# Altium PCB Ver5.PcbDoc
Units mil, origin at the board's own origin, x right, y up, seen from the top; angles counter-clockwise.
Board outline 1574.8 x 1574.8 mil, 2 copper layers (Top Layer, Bottom Layer); 42 components, 28 nets, 223 pads, 54 vias.
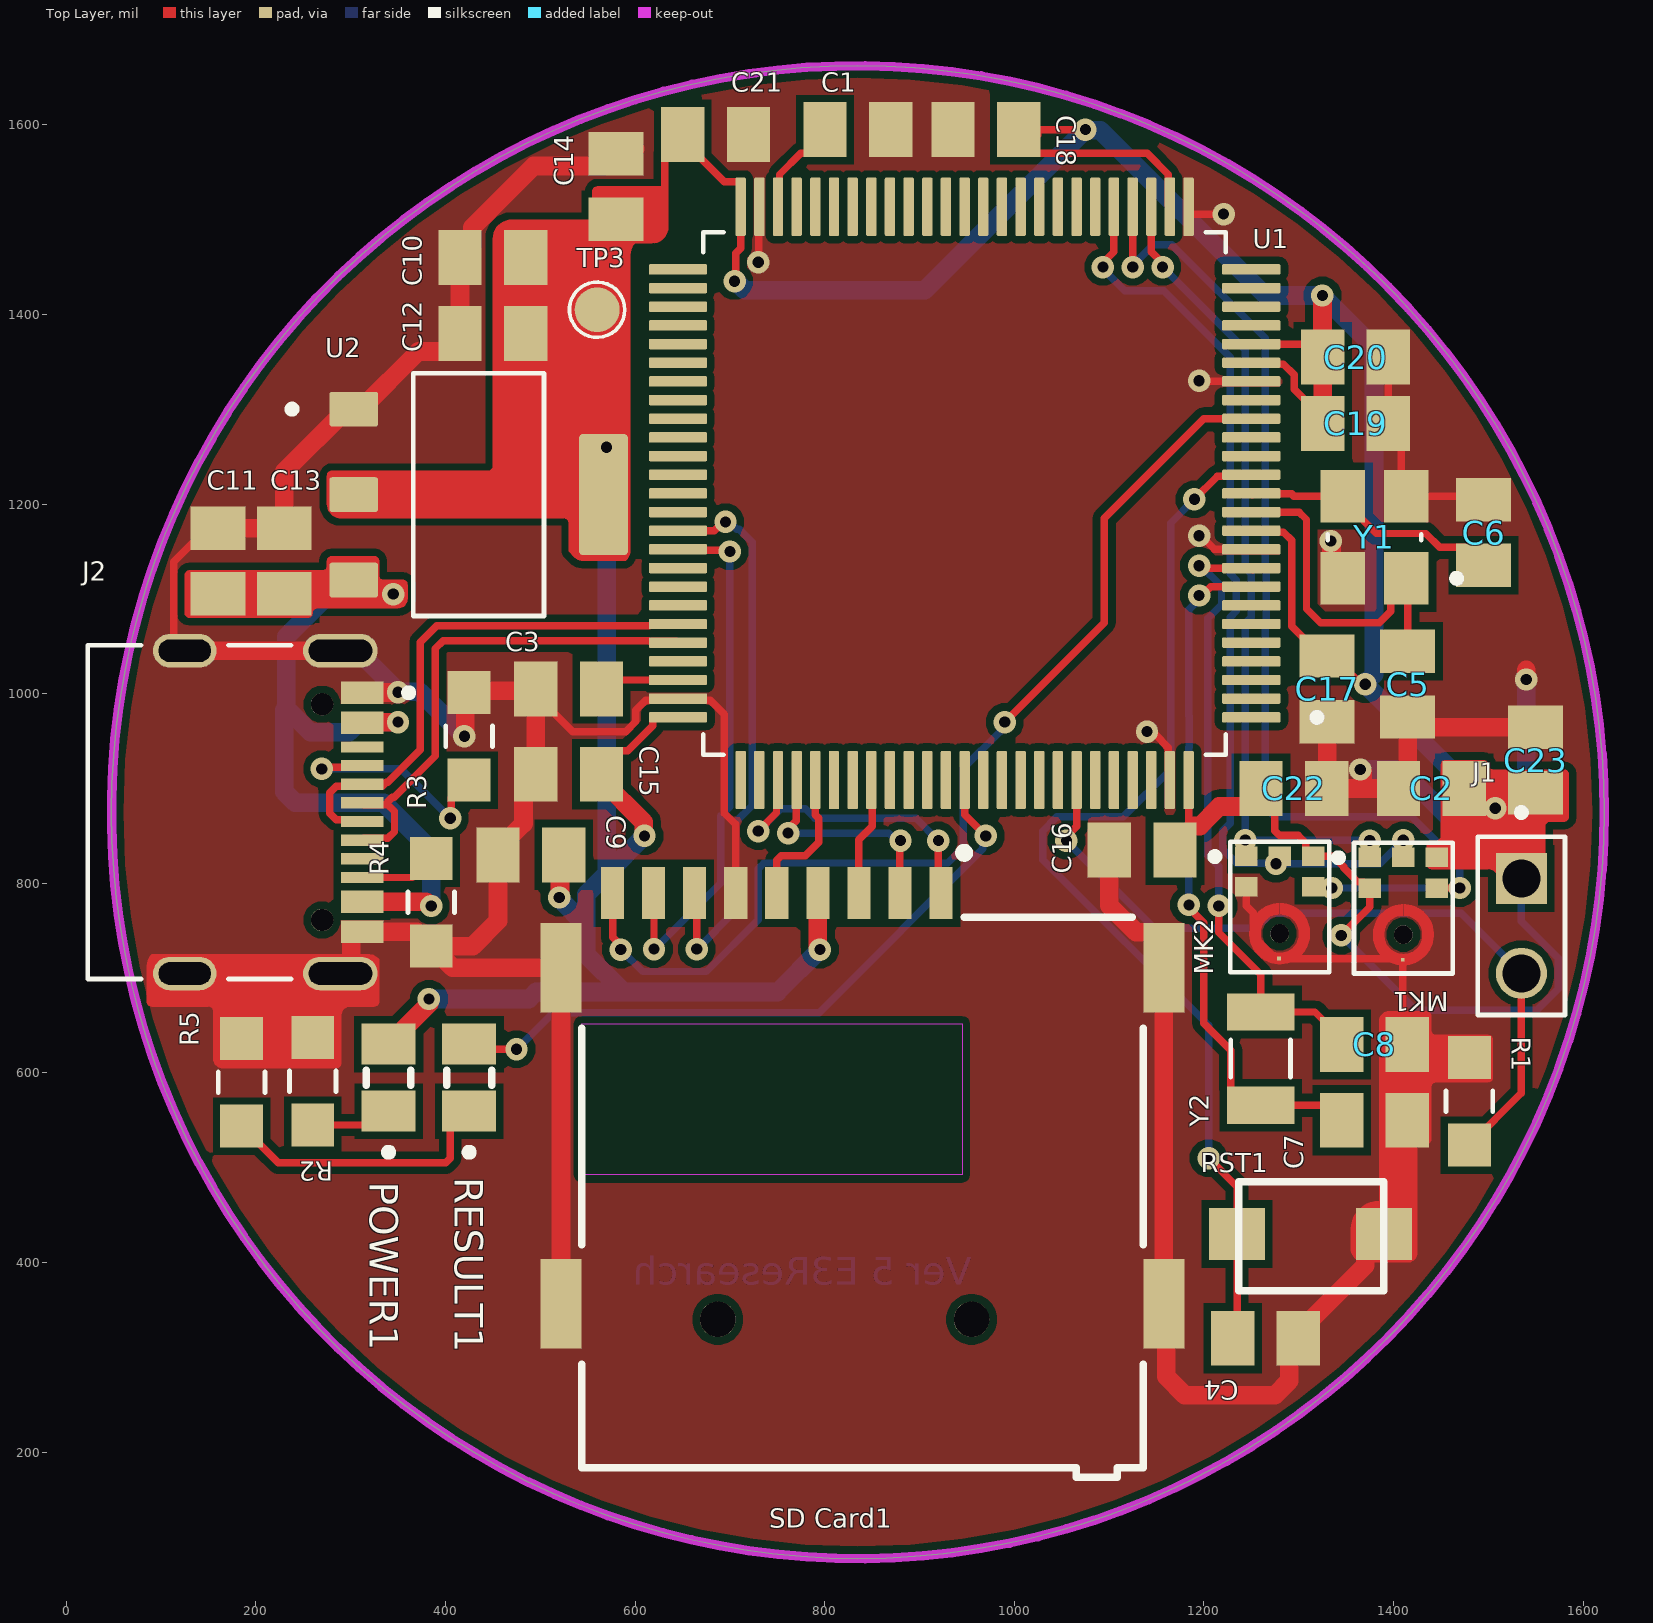
[diagram p0: Top Layer view]
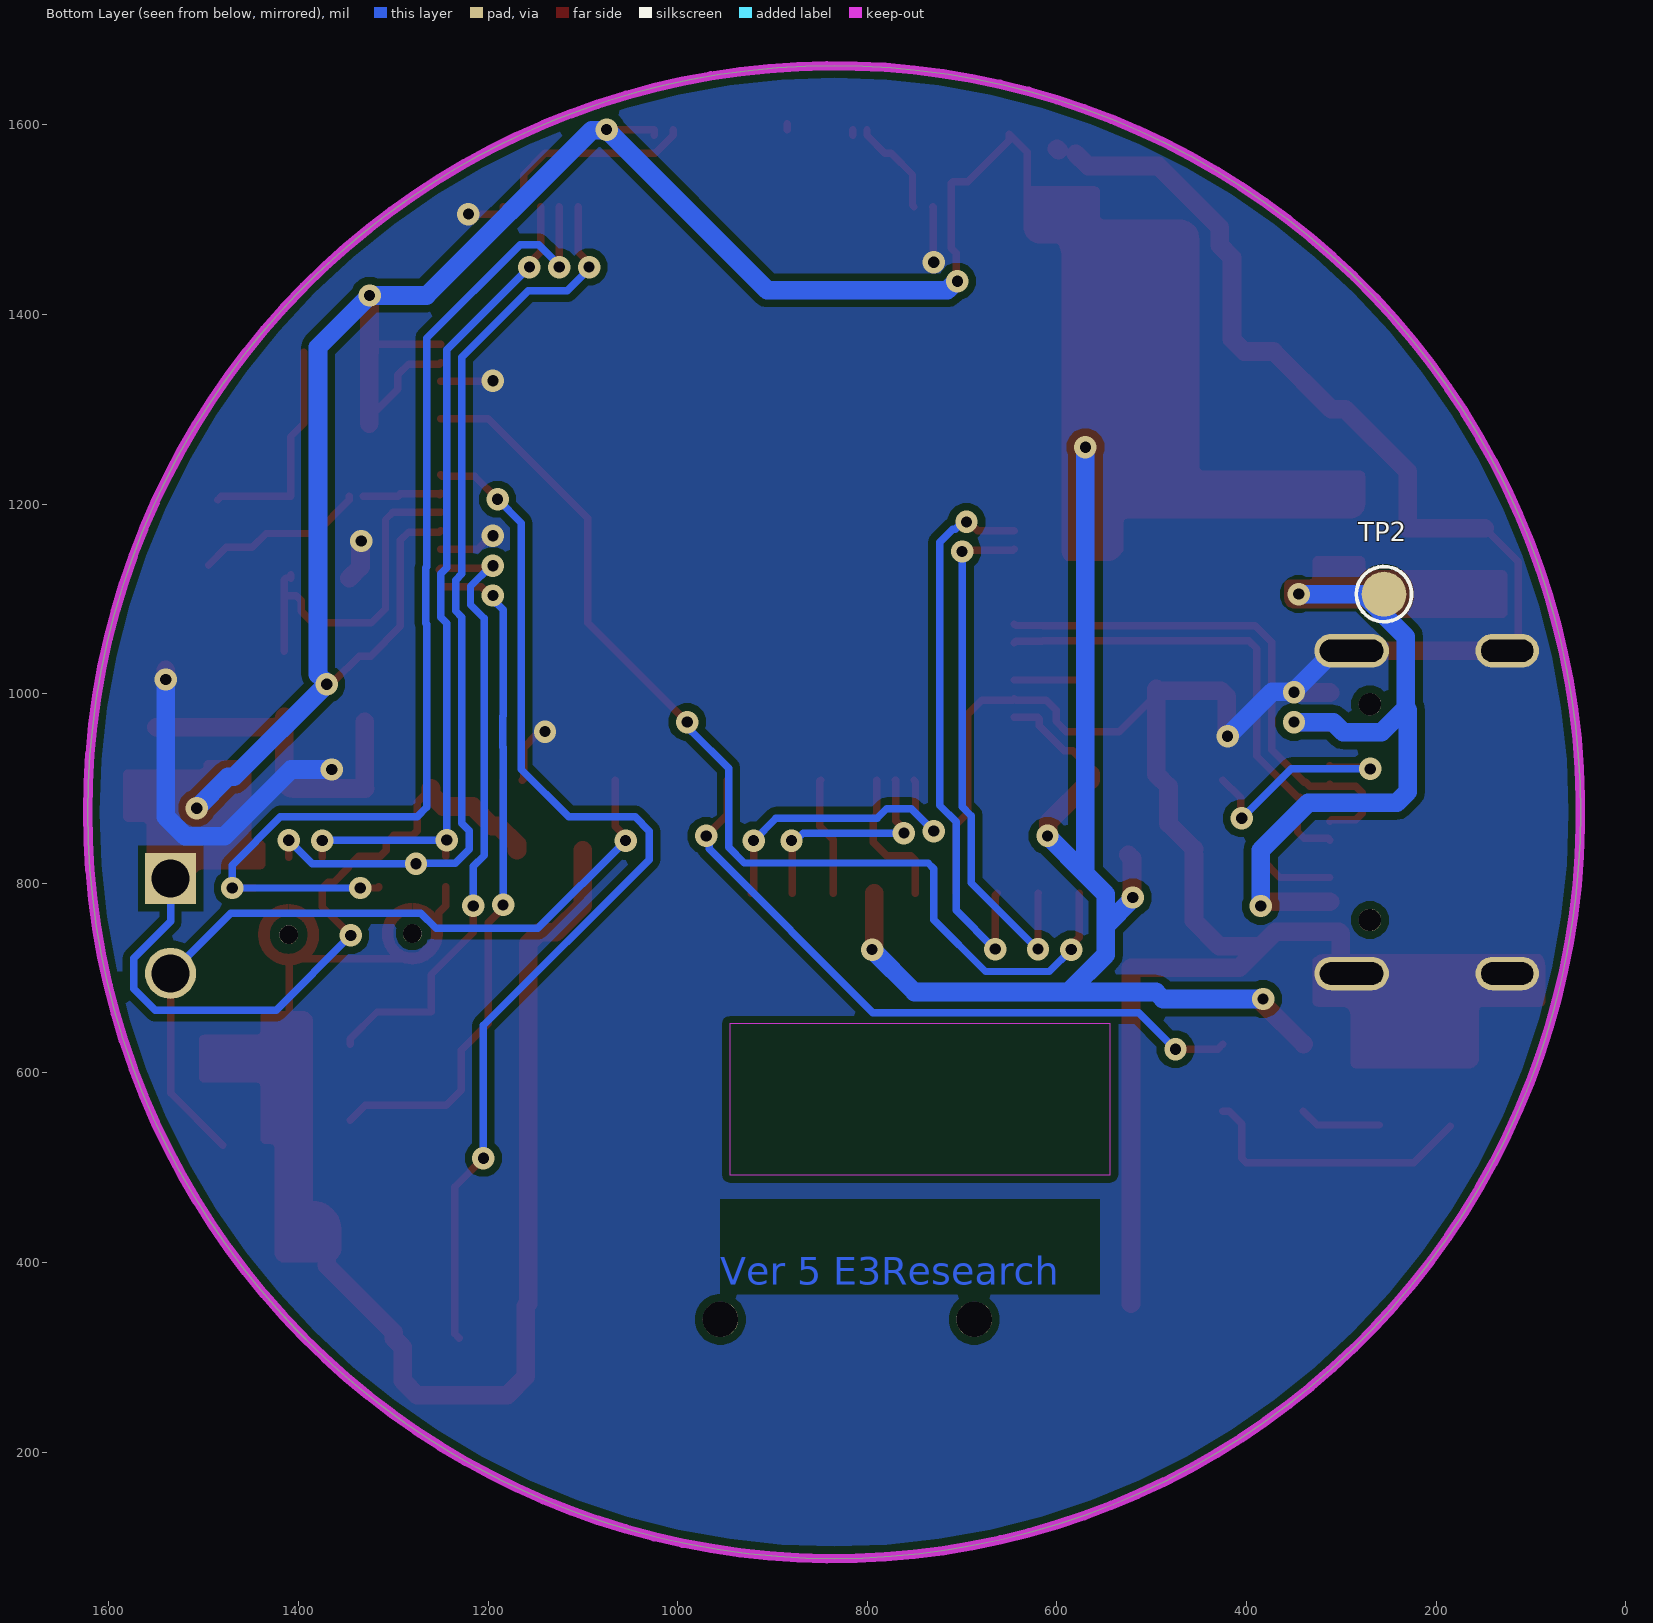
[diagram p1: Bottom Layer view, seen from below]
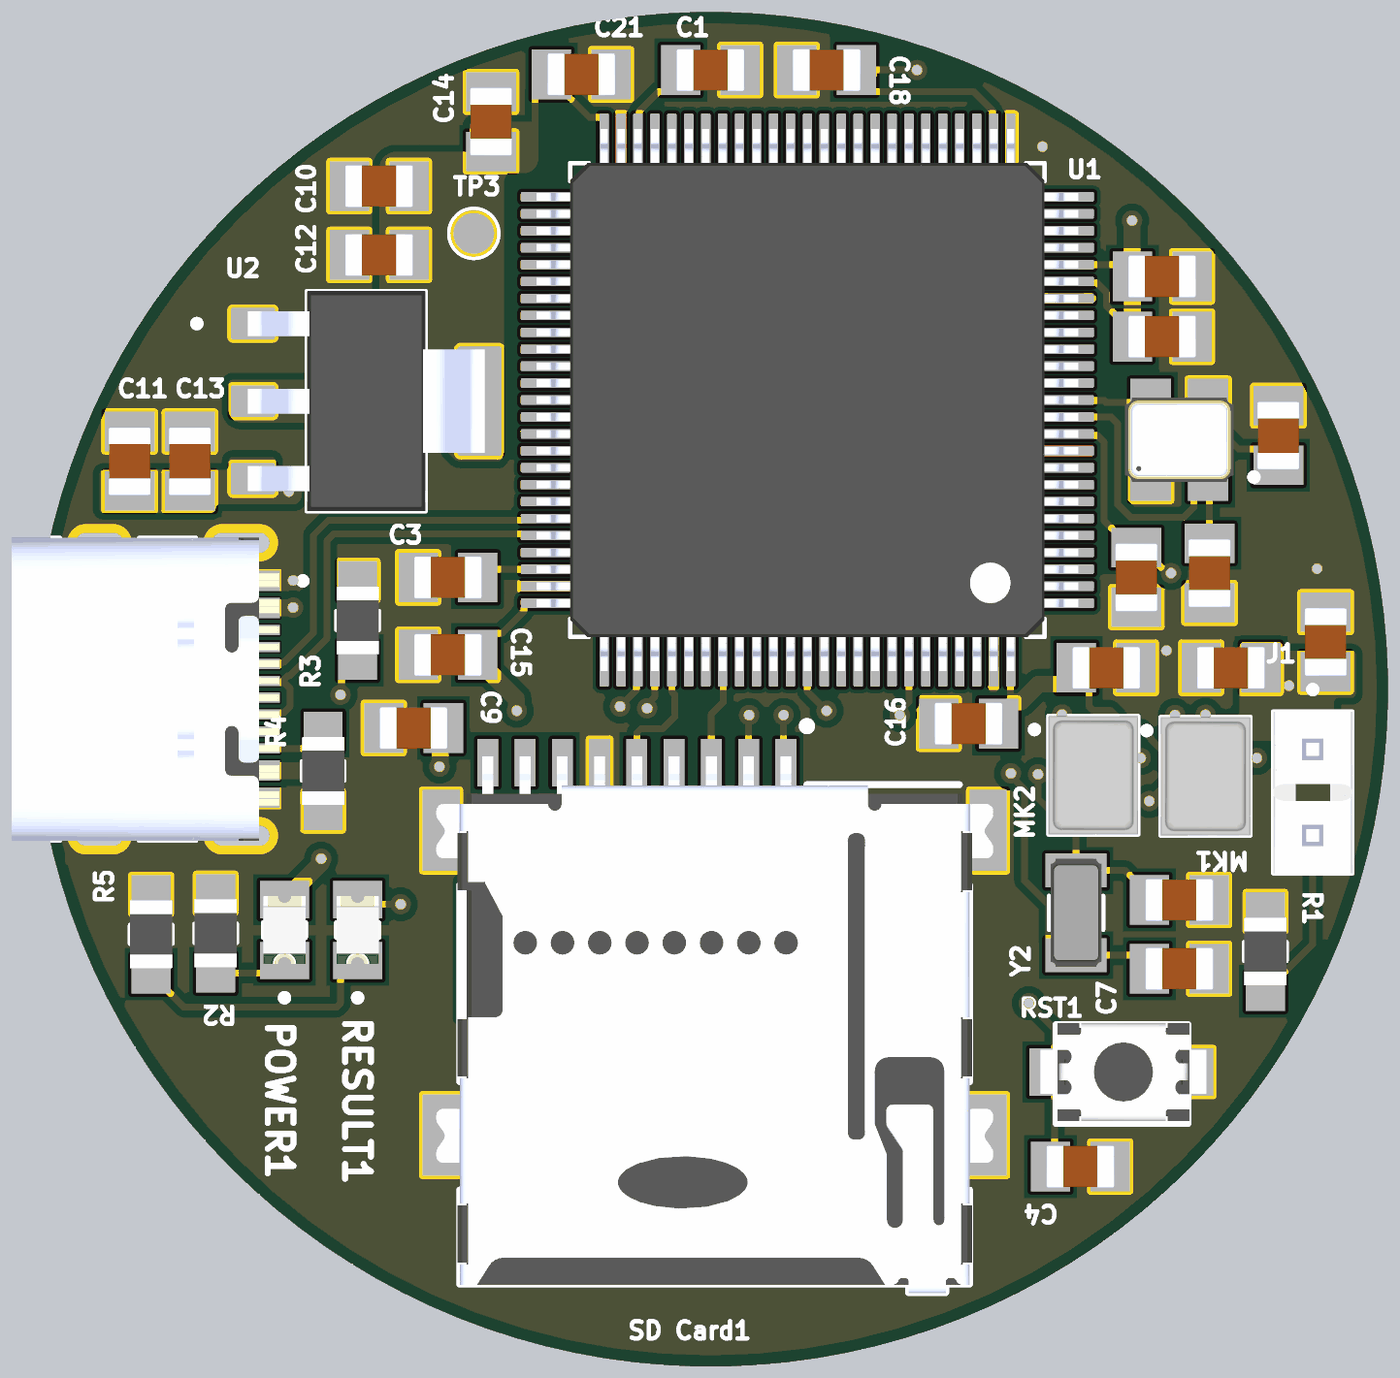
[diagram p2: 3D render of the assembled board from above, using the file's embedded part models]

## Layer stack, top to bottom
Top Solder: solder mask 0.4, Solder Resist, Dk 3.5
Top Layer: signal copper 1.4
Dielectric 1: dielectric 12.6, FR-4, Dk 4.8
Bottom Layer: signal copper 1.4
Bottom Solder: solder mask 0.4, Solder Resist, Dk 3.5

## Board outline
835,87.6 cw(c835,875) 47.6,875 cw(c835,875) 835,1662.4 cw(c835,875) 1622.4,875 cw(c835,875)

## Design rules (kind name [scope] priority, off if disabled: settings)
Clearance Clearance_1 [All] p1: gap=7.87 ignorepadtopadclearanceinfootprint=FALSE except(0: Fill-Text Poly-Text Region-Text)
Clearance Test [IsBold] p2: gap=0 ignorepadtopadclearanceinfootprint=TRUE
DiffPairsRouting [All] p1: maxlimit=10 minlimit=7.87 mostfreqgap=7.87 toplayer_minwidth=7.87 toplayer_maxwidth=7.87 toplayer_prefwidth=7.87 bottomlayer_minwidth=7.87 bottomlayer_maxwidth=7.87 bottomlayer_prefwidth=7.87 maxuncoupledlength=500
PolygonConnect [All] p1: connectstyle=Direct reliefconductorwidth=10 reliefentries=4 polygonreliefangle="90 Angle" airgapwidth=10
RoutingVias [All] p1: holewidth=11.81 width=23.62 viastyle="Through Hole" minholewidth=11.81 minwidth=23.62 maxholewidth=11.81 maxwidth=23.62
SMDNeckDown UI [IsPad and IsComponentPad and InComponent('U1')] p1: percent=80.000
SolderMaskExpansion Via [IsVia] p1: expansion=4 istentingtop=TRUE
SolderMaskExpansion SolderMaskExpansion_1 [All] p2: expansion=4 istentingtop=FALSE
SupplyNets "Schematic Supply Nets_2" [InNet('GND')] p1: voltage=0.000
SupplyNets "Schematic Supply Nets_1" [InNet('+3.3V')] p2: voltage=0.000
SupplyNets "Schematic Supply Nets" [InNet('+5V')] p3: voltage=0.000
Width Width_Power [InNet('GND') or InNet('+5V') or InNet('+3.3V') or InNet('VBUS')] p1: maxlimit=19.68 minlimit=7.87 preferedwidth=7.87
Width [All] p2: maxlimit=7.87 minlimit=7.87 preferedwidth=7.87
29 further rules are at their usual default settings.

## Classes and differential pairs
differential pair USB: +USB_P -USB_N

## Components (designator, comment, footprint, x,y, rotation, side; value= is the part's Value field where it differs from the comment)
C1 "2.2uF" CAPC2012X94N 835,1595 r180 top
C2 "0.1uF" CAPC2012X94N 1440,900 r180 top
C3 "2.2uF" CAPC2012X94N 530,1005 r0 top
C4 "0.1 µF" CAPC2012X94N 1265,320 r0 top
C5 "12pF" CAPC2012X94N 1415,1010 r270 top
C6 "12pF" CAPC2012X94N 1495,1170 r90 top
C7 "12.5pF" CAPC2012X94N 1380,550 r0 top
C8 "12.5pF" CAPC2012X94N 1380,630 r0 top
C9 "0.1uF" CAPC2012X94N 490,830 r180 top
C10 "10 µF" CAPC2012X94N 450,1460 r180 top
C11 "0.1 µF" CAPC2012X94N 160,1140 r90 top
C12 "0.1 µF" CAPC2012X94N 450,1380 r180 top
C13 "10 µF" CAPC2012X94N 230,1140 r90 top
C14 "10 µF" CAPC2012X94N 580,1535 r90 top
C15 "0.1 µF" CAPC2012X94N 530,915 r180 top
C16 "0.1 µF" CAPC2012X94N 1135,835 r180 top
C17 "0.1 µF" CAPC2012X94N 1330,1005 r270 top
C18 "0.1 µF" CAPC2012X94N 970,1595 r180 top
C19 "0.1 µF" CAPC2012X94N 1360,1285 r0 top
C20 "0.1 µF" CAPC2012X94N 1360,1355 r0 top
C21 "0.1 µF" CAPC2012X94N 685,1590 r0 top
C22 "0.1uF" CAPC2012X94N 1295,900 r180 top
C23 "0.1uF" CAPC2012X94N 1550,930 r270 top
J1 "3-644456-2" TE_3-644456-2 1535,805 r270 top
J2 "TYPE-C-31-M-12" HRO_TYPE-C-31-M-12 125,875 r270 top locked
MK1 "ICS-43434" MIC_ICS-43434 1410.43,773.78 r0 top
MK2 "ICS-43434" MIC_ICS-43434 1280,775 r0 top
POWER1 "597-5411-407F" LEDC2012X70N 340,595 r90 top
R1 "10k" RES_ERJU06J203V 1480,570 r270 top
R2 "620" RES_ERJU06J203V 260,591.26 r270 top
R3 "5.1K" RES_ERJU06J203V 425,955 r90 top
R4 "5.1K" RES_ERJU06J203V 385,780 r270 top
R5 "620" RES_ERJU06J203V 185,590 r270 top
RESULT1 "597-5411-407F" LEDC2012X70N 425,595 r90 top
RST1 "Button" Button2PSMD 1315,425 r0 top
"SD Card1" "MEM2075-00-140-01-A" GCT_MEM2075-00-140-01-A 821.14,340 r0 top locked
TP2 "Test point" PCBComponent_1 255,1105 r90 bottom
TP3 "Test point" PCBComponent_1 560,1405 r0 top
U1 "STM32H743VIT6" QFP50P1600X1600X160-100N 947.64,1211.26 r180 top locked
U2 "AMS1117-3.3" SOT229P700X180-4N 435,1210 r0 top locked
Y1 "26MHz" XTAL_C3E-24.000-12-3030-R 1380,1165 r180 top
Y2 "32.7680K" XTAL_FC-135_32.7680KA-A0 1260,615 r270 top

## Footprints (in the part's own frame and the unit in brackets; to place one, negate y for a bottom-side part, rotate by r counter-clockwise, add the part's x,y. Pads: shape width x height; smd on the part's side, far side on the other; paste and mask are expansions set on the pad)
Button2PSMD [mm]
  rect 1.5x1.4 smd: 2(-2.032,0.127) 3(1.905,0.127)
  silkscreen extent -1.99,-1.4 1.91,1.52, body extent -2.45,-1.32 2.45,1.58, height 2
CAPC2012X94N [mm]
  rect 1.16x1.47 smd: 1(-0.88,0) 2(0.88,0)
  body extent -1,-0.63 1,0.63, height 0.94
GCT_MEM2075-00-140-01-A [mm]
  rect 0.62x1.4 smd: P1(2.58,11.42) P2(1.48,11.42) P3(0.38,11.42) P4(-0.72,11.42) P5(-1.82,11.42) P6(-2.92,11.42) P7(-4.02,11.42) P8(-5.12,11.42) P9(-6.22,11.42)
  rect 1.1x2.4 smd: SH1(-7.6,0.42) SH2(-7.6,9.42) SH3(8.55,9.42) SH4(8.55,0.42)
  round 0.95 hole 0.95 unplated: ""(-3.4,0) ""(3.4,0)
  Keep-Out Layer region: 3.15,3.87 -7.05,3.87 -7.05,7.92 3.15,7.92
  silkscreen extent -7.05,-4.23 8,12.62, body extent -7.74,-4.25 8.7,11.6, height 1.45
HRO_TYPE-C-31-M-12 [mm]
  rect 0.6x1.14 smd mask+0.05: A1_B12(-3.2,4.75) A4_B9(-2.4,4.75) B1_A12(3.2,4.75) B4_A9(2.4,4.75)
  rect 0.3x1.14 smd mask+0.05: A5(-1.25,4.75) A6(-0.25,4.75) A7(0.25,4.75) A8(1.25,4.75) B5(1.75,4.75) B6(0.75,4.75) B7(-0.75,4.75) B8(-1.75,4.75)
  oval 0.9x2 hole 0.6 slot 1.7 at 90 deg: S1(-4.325,4.17) S2(4.325,4.17)
  oval 0.9x1.7 hole 0.6 slot 1.4 at 90 deg: S3(-4.325,0) S4(4.325,0)
  round 0.6 hole 0.6 unplated: ""(-2.89,3.68) ""(2.89,3.68)
  silkscreen extent -4.47,-2.6 4.47,6.1, body extent -4.47,-2.6 4.47,5.31, height 3.31
LEDC2012X70N [mm]
  rect 1.1x1.45 smd: A(0.9,0) C(-0.9,0)
  silkscreen extent -2.1,-0.6 0.2,0.6, body extent -1,-0.63 1,0.63, height 0.7
MIC_ICS-43434 [mm]
  rect 0.6x0.522 smd paste-0.05: 1(-0.9,1.361) 2(-0.9,0.539) 4(0.9,0.539) 5(0.9,1.361) 6(0,1.361)
  rect 0.1x0.1 smd paste-1 mask+0: 3(-0.015,-1.383)
  round 0.5 hole 0.5 unplated mask+0.665: ""(0,-0.713)
  Top Layer region: 250 vertices and 0 holes, not listed, extent -0.81,-1.53 0.81,0.1
  silkscreen extent -1.84,-1.75 1.33,1.75, body extent -1.33,-1.75 1.33,1.75, height 0.98
PCBComponent_1 [mm]
  round 1.2 smd paste+0: TP?(0,0)
  silkscreen extent -0.74,-0.74 0.74,0.74, body extent -0.6,-0.6 0.6,0.6, height 0.03
QFP50P1600X1600X160-100N [mm]
  rrect25% 1.56x0.28 smd: 1(-7.68,6) 2(-7.68,5.5) 3(-7.68,5) 4(-7.68,4.5) 5(-7.68,4) 6(-7.68,3.5) 7(-7.68,3) 8(-7.68,2.5) 9(-7.68,2) 10(-7.68,1.5) 11(-7.68,1) 12(-7.68,0.5) 13(-7.68,0) 14(-7.68,-0.5) 15(-7.68,-1) 16(-7.68,-1.5) 17(-7.68,-2) 18(-7.68,-2.5) 19(-7.68,-3) 20(-7.68,-3.5) 21(-7.68,-4) 22(-7.68,-4.5) 23(-7.68,-5) 24(-7.68,-5.5) 25(-7.68,-6) 51(7.68,-6) 52(7.68,-5.5) 53(7.68,-5) 54(7.68,-4.5) 55(7.68,-4) 56(7.68,-3.5) 57(7.68,-3) 58(7.68,-2.5) 59(7.68,-2) 60(7.68,-1.5) 61(7.68,-1) 62(7.68,-0.5) 63(7.68,0) 64(7.68,0.5) 65(7.68,1) 66(7.68,1.5) 67(7.68,2) 68(7.68,2.5) 69(7.68,3) 70(7.68,3.5) 71(7.68,4) 72(7.68,4.5) 73(7.68,5) 74(7.68,5.5) 75(7.68,6)
  rrect25% 0.28x1.56 smd: 26(-6,-7.68) 27(-5.5,-7.68) 28(-5,-7.68) 29(-4.5,-7.68) 30(-4,-7.68) 31(-3.5,-7.68) 32(-3,-7.68) 33(-2.5,-7.68) 34(-2,-7.68) 35(-1.5,-7.68) 36(-1,-7.68) 37(-0.5,-7.68) 38(0,-7.68) 39(0.5,-7.68) 40(1,-7.68) 41(1.5,-7.68) 42(2,-7.68) 43(2.5,-7.68) 44(3,-7.68) 45(3.5,-7.68) 46(4,-7.68) 47(4.5,-7.68) 48(5,-7.68) 49(5.5,-7.68) 50(6,-7.68) 76(6,7.68) 77(5.5,7.68) 78(5,7.68) 79(4.5,7.68) 80(4,7.68) 81(3.5,7.68) 82(3,7.68) 83(2.5,7.68) 84(2,7.68) 85(1.5,7.68) 86(1,7.68) 87(0.5,7.68) 88(0,7.68) 89(-0.5,7.68) 90(-1,7.68) 91(-1.5,7.68) 92(-2,7.68) 93(-2.5,7.68) 94(-3,7.68) 95(-3.5,7.68) 96(-4,7.68) 97(-4.5,7.68) 98(-5,7.68) 99(-5.5,7.68) 100(-6,7.68)
  silkscreen extent -9.54,-7 7,7, body extent -8,-8 8,8, height 1.6
RES_ERJU06J203V [mm]
  rect 1.15x1.15 smd: 1(-1.175,0) 2(1.175,0)
  silkscreen extent -0.28,-0.63 0.28,0.63, body extent -1,-0.63 1,0.63, height 0.6
SOT229P700X180-4N [mm]
  rrect15% 1.31x0.93 smd: 1(-3.345,2.29) 2(-3.345,0) 3(-3.345,-2.29)
  rrect15% 1.31x3.24 smd: 2(3.345,0)
  silkscreen extent -5.1,-3.25 1.75,3.25, body extent -3.5,-3.25 3.5,3.25, height 1.8
TE_3-644456-2 [mm]
  rect 1.37x1.37 / inner round 1.37 / far side rect 1.37x1.37 hole 1.02: 1(0,0)
  round 1.37 hole 1.02: 2(2.54,0)
  silkscreen extent -1.87,-1.17 3.66,1.17, body extent -1.12,-1.17 3.66,1.17, height 10.03
XTAL_C3E-24.000-12-3030-R [mm]
  rect 1.2x1.4 smd: 1(-0.85,1.1) 2(-0.85,-1.1) 3(0.85,-1.1) 4(0.85,1.1)
  silkscreen extent -2.3,-0.08 1.25,1.2, body extent -1.25,-1.6 1.25,1.6, height 0.75
XTAL_FC-135_32.7680KA-A0 [mm]
  rect 1x1.8 smd: 1(-1.25,0) 2(1.25,0)
  silkscreen extent -0.5,-0.8 0.5,0.8, body extent -1.6,-0.75 1.6,0.75, height 0.9

## Part data
C1 C3 C5 C6 C7 C8: library part CL10B104KB8NNNC, "CAP 0805", Package="1608-2 SAMSUNG", Check_prices=https://www.snapeda.com/parts/CL10B104KB8NNNC/Samsung/view-part/?ref=eda, MF="Samsung Electro-Mechanics", MP=CL10B104KB8NNNC, SnapEDA_Link=https://www.snapeda.com/parts/CL10B104KB8NNNC/Samsung/view-part/?ref=snap
C2 C4 C11 C12 C15 C16 C17 C18 C19 C20 C21 C22 C23: library part CL10B104KB8NNNC, "104 CAP 0805", Package="1608-2 SAMSUNG", Check_prices=https://www.snapeda.com/parts/CL10B104KB8NNNC/Samsung/view-part/?ref=eda, MF="Samsung Electro-Mechanics", MP=CL10B104KB8NNNC, SnapEDA_Link=https://www.snapeda.com/parts/CL10B104KB8NNNC/Samsung/view-part/?ref=snap
C9 C14: library part CL10B104KB8NNNC, "106 CAP 0805", Package="1608-2 SAMSUNG", Check_prices=https://www.snapeda.com/parts/CL10B104KB8NNNC/Samsung/view-part/?ref=eda, MF="Samsung Electro-Mechanics", MP=CL10B104KB8NNNC, SnapEDA_Link=https://www.snapeda.com/parts/CL10B104KB8NNNC/Samsung/view-part/?ref=snap
C10: library part 0805YC103J4T2A, "106 10uF 0805 SMD", Package="2012 AVX", Check_prices=https://www.snapeda.com/parts/0805YC103J4T2A/AVX/view-part/?ref=eda, MF=AVX, MP=0805YC103J4T2A, SnapEDA_Link=https://www.snapeda.com/parts/0805YC103J4T2A/AVX/view-part/?ref=snap
C13: library part 0805YC103J4T2A, "10uF 106 0805 SMD", Package="2012 AVX", Check_prices=https://www.snapeda.com/parts/0805YC103J4T2A/AVX/view-part/?ref=eda, MF=AVX, MP=0805YC103J4T2A, SnapEDA_Link=https://www.snapeda.com/parts/0805YC103J4T2A/AVX/view-part/?ref=snap
J1: "HEADER ASSEMBLY, NARROW, MTA-100, 2 POSITION, STRAIGHT", Package=None, Check_prices=https://www.snapeda.com/parts/3-644456-2/TE+Connectivity+AMP+Connectors/view-part/?ref=eda, MF="TE Connectivity", MP=3-644456-2, SnapEDA_Link=https://www.snapeda.com/parts/3-644456-2/TE+Connectivity+AMP+Connectors/view-part/?ref=snap
J2: "USB Connectors 24 Receptacle 1 8.94*7.3mm RoHS", Package=Package, Check_prices=https://www.snapeda.com/parts/TYPE-C-31-M-12/HRO+Electronics+Co.%252C+Ltd./view-part/?ref=eda, MF="HRO Electronics Co., Ltd.", MP=TYPE-C-31-M-12, SnapEDA_Link=https://www.snapeda.com/parts/TYPE-C-31-M-12/HRO+Electronics+Co.%252C+Ltd./view-part/?ref=snap
MK1 MK2: "60 Hz ~ 20 kHz Digital, IÂ²S Microphone MEMS (Silicon) 1.65 V ~ 3.63 V Omnidirectional (-26 Â±1dB @ 94dB SPL) Solder Pads", Package="Custom Package TDK InvenSense", Availability="In Stock", Check_prices=https://www.snapeda.com/parts/ICS-43434/TDK+InvenSense/view-part/?ref=eda, MF="TDK InvenSense", MP=ICS-43434, Price=None, Purchase-URL=https://pricing.snapeda.com/search/part/ICS-43434/?ref=eda, SnapEDA_Link=https://www.snapeda.com/parts/ICS-43434/TDK+InvenSense/view-part/?ref=snap
POWER1 RESULT1: "SMD LED 0805 YG 7", Package="0805 Dialight", Check_prices=https://www.snapeda.com/parts/597-5411-407F/Dialight/view-part/?ref=eda, MF=Dialight, MP=597-5411-407F, SnapEDA_Link=https://www.snapeda.com/parts/597-5411-407F/Dialight/view-part/?ref=snap
R1 R2 R3 R4 R5: library part R0805, "R0805", Package=None, Availability=Unavailable, MP=ERJU06J203V, Price=None
RST1: library part Component_1
"SD Card1": "9 (8 + 1) Position Card Connector microSD Surface Mount, Right Angle Gold", Package=None, Check_prices=https://www.snapeda.com/parts/MEM2075-00-140-01-A/Global+Connector+Technology/view-part/?ref=eda, MF="Global Connector Technology", MP=MEM2075-00-140-01-A, SnapEDA_Link=https://www.snapeda.com/parts/MEM2075-00-140-01-A/Global+Connector+Technology/view-part/?ref=snap
TP2 TP3: library part Test_Point
U1: "ARMÂ® CortexÂ®-M7 STM32H7 Microcontroller IC 32-Bit Single-Core 480MHz 2MB (2M x 8) FLASH 100-LQFP (14x14)", Package="LQFP-100 STMicroelectronics", Check_prices=https://www.snapeda.com/parts/STM32H743VIT6/STMicroelectronics/view-part/?ref=eda, MF=STMicroelectronics, MP=STM32H743VIT6, SnapEDA_Link=https://www.snapeda.com/parts/STM32H743VIT6/STMicroelectronics/view-part/?ref=snap
U2: "Sot223/Pkg 1-Amp 3.3-Volt Low Drop Out Voltage Regulatator", Package="SOT-223 Seeed Technology", Check_prices=https://www.snapeda.com/parts/AMS1117-3.3/Advanced+Monolithic+Systems/view-part/?ref=eda, MF="Advanced Monolithic Systems", MP=AMS1117-3.3, SnapEDA_Link=https://www.snapeda.com/parts/AMS1117-3.3/Advanced+Monolithic+Systems/view-part/?ref=snap
Y1: library part C3E-24.000-12-3030-R, "3225SMD", Package=None, Availability=Unavailable, MP=C3E-24.000-12-3030-R, Price=None
Y2: library part FC-135_32.7680KA-A0, "32.768 kHz Â±20ppm Crystal 12.5pF 70 kOhms 2-SMD, No Lead / 3215SMD", Package="SMD-2 Epson", Check_prices=https://www.snapeda.com/parts/FC-135%2032.7680KA-A0/EPSON/view-part/?ref=eda, MF=EPSON, MP="FC-135 32.7680KA-A0", SnapEDA_Link=https://www.snapeda.com/parts/FC-135%2032.7680KA-A0/EPSON/view-part/?ref=snap

## Via types
v1: diameter 23.62, hole 11.81, Top Layer to Bottom Layer, tented both sides, 54 vias

## Nets (pads, with @x,y where several pads share a name; then routed paths per layer and width w, separated by ;. In a path a pad name is that pad's centre, name@x,y a point inside that pad or via, vN(x,y) a via of type N, cw(c..) or ccw(c..) an arc to the next point about the centre after c; other vN are vias at no path point)
+3.3V: "SD Card1.P4" C2.1 C9.1 C10.1 C12.1 C14.1 C15.1 C16.1 C17.1 C18.1 C19.1 C20.1 C21.1 C22.2 C23.2 J1.1 MK1.2 MK1.5 MK2.5 POWER1.A TP3.TP? U1.11 U1.20 U1.21 U1.27 U1.50 U1.75 U1.100 U2.2 | length 4899.9
  Top Layer w7.87: C15.1 564.65,921.1 583.54,940 592.27,940 618.5,966.23 618.5,973.46 620.08,975.04 U1.75 ; U2.2@566.69,1210 566.69,1256.69 v1(570,1260) ; 615,1505 631.46,1521.46 631.46,1571.1 C21.1 650.35,1583.9 694.09,1540.16 709.84,1540.16 711.42,1538.58 U1.50 711.42,1469.82 706.38,1464.78 706.38,1436.38 v1(705,1435) ; C18.1 1004.65,1588.9 1023.54,1570 1140.23,1570 1162.6,1547.63 1162.6,1515.2 U1.27 ; C18.1@1024.65,1588.9 1024.65,1595 v1(1075,1595) ; C16.1@1183.86,860.47 U1.100 ; U1.11 1251.57,1170.31 1284.01,1170.31 1292.52,1161.8 1292.52,1071.02 1323.9,1039.65 1336.1,1039.65 1362.73,1013.01 1367.3,1013.01 v1(1370.32,1010) ; U1.20 1251.57,1347.48 1284.01,1347.48 1295.23,1336.26 1295.23,1321.23 1325.35,1291.1 C19.1 ; U1.21 C20.1@1316.61,1368.74 ; C22.2 1275,885.35 1275,855.28 1279.61,850.67 1299.33,850.67 1307.56,842.44 1307.56,834.92 1313.9,828.58 MK2.5 1336.42,828.58 1347.36,817.64 1347.36,816.22 1362.23,801.34 1368.66,801.34 MK1.2 1375,774.96 v1(1345,744.96) ; C20.1@1325,1360.35 C20.1@1325.35,1360 ; MK1.5 MK1.5@1447.4,827.36 ; v1@1505,870 1505,876.76 v1(1507.45,879.21)
  Top Layer w19.68: POWER1.A 382.59,673.02 v1(382.59,677.93) ; v1(520,785) 520.75,785.75 520.75,826.11 C9.1 ; C15.1 564.65,908.9 609.25,864.3 609.25,850.75 v1(610,850) ; 792.8,789.61 792.8,733.27 795,731.07 v1(795,730) ; C16.1 1169.65,841.1 1189.02,860.47 1195.9,860.47 1216.33,880.91 1247.36,880.91 1260.35,893.9 C22.2 ; v1(1325,1420) 1325.18,1419.82 1325.18,1360.18 1325.35,1360 C19.1
  Bottom Layer w7.87: v1(1345,744.96) 1423.74,666.22 1551.06,666.22 1573.78,688.94 1573.78,721.06 1535,759.84 J1.1
  Bottom Layer w19.68: v1(382.59,677.93) 488.16,677.93 495.5,685.28 587.97,685.28 ; v1(520,785) 520,783.93 548.59,755.34 ; v1(570,1260) 570,810 ; v1(610,850) 570,810 ; v1(705,1435) 706.07,1435 715.59,1425.47 905.47,1425.47 v1(1075,1595) 1075.75,1594.25 1090.75,1594.25 1265,1420 v1(1325,1420) 1379.53,1365.47 1379.53,1020.28 1370.32,1011.07 v1(1370.32,1010) 1468.09,912.23 1474.44,912.23 v1(1507.45,879.21) ; v1(795,730) 750.28,685.28 587.97,685.28 ; 548.59,755.34 548.59,788.59 570,810 ; 548.59,755.34 548.59,724.65 587.97,685.28
+5V: C11.1 C13.1 J2.A4_B9 J2.B4_A9 TP2.TP? U2.3 | length 781.3
  Top Layer w19.68: J2.B4_A9 379.49,780.51 383.93,776.06 v1(385,776.06) ; J2.A4_B9 312.26,969.74 349.74,969.74 v1(350,970)
  Bottom Layer w19.68: v1(345,1105) 277.13,1105 232.09,1059.95 232.09,984.82 ; v1(350,970) 308.66,969.99 297.92,959.25 257.65,959.25 232.09,984.82 ; v1(385,776.06) 385,835 335,885 241.53,885 230,896.53 230,982.73 232.09,984.82
BOOT0: J1.2 R1.2 U1.94 | length 823.7
  Top Layer w7.87: v1(1055,845) 1055,849.26 1065.71,859.97 U1.94 U1.94 ; R1.2 1535,578.74 J1.2
  Bottom Layer w7.87: v1(1055,845) 1147.48,752.52 1254.97,752.52 1271.03,768.58 1471.42,768.58 J1.2
GND: "SD Card1.P6" "SD Card1.SH1" "SD Card1.SH2" "SD Card1.SH3" "SD Card1.SH4" C1.1 C2.2 C3.1 C4.2 C5.2 C6.2 C7.2 C8.2 C9.2 C10.2 C11.2 C12.2 C13.2 C14.2 C15.2 C16.2 C17.2 C18.2 C19.2 C20.2 C21.2 C22.1 C23.1 J2.A1_B12 J2.B1_A12 J2.S1 J2.S2 J2.S3 J2.S4 MK1.3 MK2.2 MK2.3 R1.1 R2.1 R3.2 R4.2 R5.1 RST1.3 U1.10 U1.19 U1.26 U1.49 U1.74 U1.99 U2.1 Y1.2 Y1.4 | length 5491.7
  Top Layer w7.87: J2.S3 113.19,1057.09 113.19,1138.94 C11.2@148.9,1174.65 ; C3.1@495.35,998.9 534.25,960 590,960 600.63,970.63 600.63,982.51 611.27,993.15 643.7,993.15 U1.74 646.85,993.15 679.28,993.15 694.09,978.34 694.09,874.1 706.18,862.02 706.18,789.61 ; v1(730,1455) 730.55,1455.55 730.55,1513.07 U1.49 ; C1.1@884.65,1595 C1.1@884.65,1601.1 ; v1(1140,960) 1143.01,956.99 1148.52,956.99 1162.6,942.9 1162.6,910.47 U1.99 ; U1.26 1183.86,1507.45 1185.43,1505.88 v1(1220.88,1505.88) ; v1(1195,1166.5) 1196.91,1166.5 1211.2,1152.2 U1.10 ; v1(1195,1330) 1195.32,1329.68 1249.68,1329.68 U1.19 ; MK2.2 1244.57,776.33 1252.05,768.85 1252.05,744.26 1275.76,720.55 MK2.3 1408.6,720.55 MK1.3 1409.82,634.82 C8.2 ; Y1.4@1335,1133.23 Y1.4 ; C20.2@1394.65,1360 C19.2 1408.46,1271.18 1408.46,1208.31 Y1.2 1481.34,1208.31 C6.2@1485,1204.65
  Top Layer w19.68: J2.S4 J2.S2 ; J2.S3 J2.S1 ; C11.2@148.9,1174.65 C13.2 230,1234.33 295.83,1300.16 U2.1 310.79,1300.16 371.54,1360.91 402.36,1360.91 415.35,1373.9 C12.2 C10.2 428.35,1472.99 428.35,1491.69 493.31,1556.65 567.01,1556.65 C14.2 ; J2.S2@293.32,704.72 300.59,712 300.59,747.05 302.56,749.02 J2.B1_A12 369.72,749.02 R4.2 ; J2.A1_B12 312.26,1001.24 349.74,1001.24 v1(350,1001.5) ; v1(420,955) 420.75,955.75 420.75,997.01 426.87,1003.13 493.48,1003.13 C3.1 495.35,998.9 C15.2 482.36,902.01 482.36,863.11 C9.2@455.35,836.1 ; C9.2 455.35,760.35 428.74,733.74 R4.2 ; 521.93,356.54 521.93,710.87 407.87,710.87 R4.2 ; C14.2@598.42,1573.07 C14.2@600,1574.65 ; C16.2 1100.35,776.54 1128.62,748.27 1145.94,748.27 1157.76,736.46 1157.76,710.87 1157.76,356.54 1160.24,354.06 1160.24,279.76 1180,260 1275,260 1290.24,275.24 1290.24,310.6 C4.2 ; C4.2@1299.65,326.1 1370.31,396.77 1370.31,412.28 1388.03,430 RST1.3 ; C17.2 1330,900 C22.1 1367.5,900 ; v1(1333.94,1161.06) 1334.69,1160.31 1334.69,1133.54 Y1.4 ; v1(1365,920) 1367.5,917.5 1367.5,900 ; v1(1540,1015) v1@1540,1025 ; C23.1 1425.71,964.65 cw(c1425.71,975.35) C5.2 1415,909.65 cw(c1405.35,909.65) C2.2 1367.5,900
  Bottom Layer w19.68: J2.S1 307.29,1045.28 350,1002.56 v1(350,1001.5) ; v1@350.57,1002.07 372.93,1002.07 v1(420,955) ; v1(1365,920) 1407.72,920 1478.03,849.68 1519.68,849.68 1540,870 v1(1540,1015)
LedResult: RESULT1.A U1.88 | length 714.9
  Top Layer w7.87: RESULT1.A 430.43,625 v1(475,625) ; U1.88 947.64,872.36 v1(970,850)
  Bottom Layer w7.87: v1(475,625) 513.62,663.62 794.3,663.62 966.99,836.31 966.99,846.99 v1(970,850)
NetC4_1: C4.1 RST1.2 U1.14 | length 1149.9
  Top Layer w7.87: v1(1190,1205) 1214.37,1229.37 1248.43,1229.37 U1.14 ; v1(1205,510) 1235,480 RST1.2 1235,324.65 C4.1
  Bottom Layer w7.87: v1(1190,1205) 1165,1180 1165,920 1115,870 1045,870 1030,855 1030,825 1205,650 v1(1205,510)
NetPOWER1_C: POWER1.C R2.2 | length 86
  Top Layer w7.87: R2.2 325.43,545 POWER1.C
NetR5_2: R5.2 RESULT1.C | length 299.8
  Top Layer w7.87: R5.2 223.54,505.2 400.2,505.2 405,510 405,546.46 418.11,559.57 RESULT1.C
PC15-OSC32-IN: C7.1 U1.8 Y2.2 | length 733.7
  Top Layer w7.87: v1(1184.21,777.2) 1184.21,774.22 1199.94,758.49 1199.94,652.46 1228.5,623.89 1228.5,581.54 1244.25,565.79 Y2.2 1329.57,565.79 C7.1 ; v1(1195,1103.5) 1198.15,1103.5 1207.48,1112.83 U1.8
  Bottom Layer w7.87: v1(1184.21,777.2) 1184.21,943.53 1184.37,943.69 1184.37,976.31 1184.21,976.47 1184.21,1088.45 1195,1099.24 v1(1195,1103.5)
PC15-OSC32-OUT: C8.1 U1.9 Y2.1 | length 672.5
  Top Layer w7.87: v1(1195,1135) ccw(c1197.48,1135) 1197.48,1132.52 U1.9 U1.9@1251.57,1130.94 ; v1(1215.68,776.14) 1215.68,748.08 1260,703.76 Y2.1 1317.24,664.21 1345.35,636.1 C8.1
  Bottom Layer w7.87: v1(1195,1135) 1196.91,1135 1218.62,1113.29 1218.62,1093.72 1204.22,1079.32 1204.22,829.28 1215.68,817.82 v1(1215.68,776.14)
PH0-OSC-IN: C5.1 U1.12 Y1.1 | length 366.7
  Top Layer w7.87: U1.12 1300.39,1191.57 1308.27,1183.69 1308.27,1089.76 1323.03,1075 1385,1075 1396.94,1086.94 1396.94,1098.07 1402.33,1103.46 Y1.1@1413.46,1103.46 ; Y1.1@1408.46,1121.69 Y1.1@1408.46,1125.63 ; Y1.1 1415,1120.16 1415,1103.46 C5.1
PH1-OSC_OUT: C6.1 U1.13 Y1.3 | length 265.5
  Top Layer w7.87: U1.13@1251.26,1210 U1.13 1250.47,1210.79 1292.52,1210.79 1295,1208.31 Y1.3@1331.54,1208.31 ; Y1.3 1346.54,1204.37 1381.97,1168.94 1434.1,1168.94 1448.79,1154.25 1476.1,1154.25 C6.1
SCK: MK1.4 MK2.4 U1.29 | length 1184.9
  Top Layer w7.87: U1.29 1124.9,1513.52 1124.9,1450.1 v1(1125,1450) ; MK2.4 ccw(c1316.65,796.22) 1316.65,795 v1(1335,795) ; MK1.4 v1(1470,795)
  Bottom Layer w7.87: v1(1125,1450) 1125,1451.91 1146.71,1473.62 1166.28,1473.62 1265,1374.9 1265,1133.72 1265.87,1132.86 1265.87,1074.15 1265,1073.28 1265,880 1275,870 1419.15,870 1470,819.15 v1(1470,795) v1(1335,795)
SDI: MK1.6 MK2.6 U1.30 | length 996.1
  Top Layer w7.87: v1(1093.5,1450) 1093.5,1454.26 1105.12,1465.88 U1.30 ; MK1.6 v1(1410.43,845.32)
  Bottom Layer w7.87: v1(1093.5,1450) 1093.5,1448.09 1116.59,1425 1157.85,1425 1227.85,1355 1227.85,1126.34 1234.37,1119.81 1234.37,1087.2 1227.85,1080.67 1227.85,863.24 1219.97,855.37 1219.97,835.8 1234.62,821.15 1275.45,821.15 v1(1276.06,820.53) 1385.65,820.53 v1(1410.43,845.32)
SDIO_CLK: "SD Card1.P5" U1.80 | length 154
  Top Layer w7.87: 749.49,789.61 749.49,824.49 754.25,829.25 779.64,829.25 793.78,843.39 793.78,868.78 790.16,872.4 U1.80
SDIO_CMD: "SD Card1.P3" U1.83 | length 125.4
  Top Layer w7.87: 836.1,789.61 836.1,846.1 850,860 850,908.11 U1.83
SDIO_D0: "SD Card1.P7" U1.65 | length 604.8
  Top Layer w7.87: U1.65 683.56,1171.89 692.84,1181.17 v1(695.45,1181.17) ; 662.87,789.61 665,787.48 v1(665,730.55)
  Bottom Layer w7.87: v1(665,730.55) 665.55,730.55 706.38,771.38 706.38,864.78 723.62,882.03 723.62,1159.78 709.78,1173.62 707.25,1173.62 699.71,1181.17 v1(695.45,1181.17)
SDIO_D1: "SD Card1.P8" U1.66 | length 567.8
  Top Layer w7.87: 619.57,789.61 620,789.17 v1(620,730.55) ; U1.66 646.38,1151.1 698.9,1151.1 v1(700,1150)
  Bottom Layer w7.87: v1(620,730.55) 620.55,730.55 690.63,800.63 690.63,871.31 700,880.68 v1(700,1150)
SDIO_D2: "SD Card1.P1" U1.78 | length 332.7
  Top Layer w7.87: v1(730,855) 749.21,874.21 749.21,907.32 U1.78 ; v1(920,845) 920,792.32 922.72,789.61
  Bottom Layer w7.87: v1(730,855) 753.62,878.62 779.78,878.62 789.78,868.62 896.38,868.62 v1(920,845)
SDIO_D3: "SD Card1.P2" U1.79 | length 237.2
  Top Layer w7.87: v1(761.42,852.87) 761.42,857.14 770.24,865.95 770.24,908.66 U1.79 ; 879.41,789.61 879.41,844.41 v1(880,845)
  Bottom Layer w7.87: v1(761.42,852.87) 867.86,852.87 875.74,845 v1(880,845)
SDIO_NCD: "SD Card1.P9" U1.17 | length 1127
  Top Layer w7.87: 576.26,789.61 576.26,743 585,734.26 v1(585,730) ; v1(990,970) 1095,1075 1095,1185 1200,1290 U1.17
  Bottom Layer w7.87: v1(585,730) 608.07,706.93 675.34,706.93 730,761.59 730,815.39 735.99,821.38 929.78,821.38 946.38,837.97 946.38,921.38 985,960 985,960.74 990,965.74 v1(990,970)
USB_CC1: J2.A5 R3.1 | length 249.6
  Top Layer w7.87: v1(269.47,920.63) 271.26,922.42 310.22,922.42 J2.A5 ; v1(405,868.58) 406.3,869.88 406.3,890.04 R3.1
  Bottom Layer w7.87: v1(269.47,920.63) 352.95,920.63 v1(405,868.58)
USB_CC2: J2.B5 R4.1 | length 81.3
  Top Layer w7.87: J2.B5 364.84,806.1 R4.1
USB_N: J2.A7 J2.B7 U1.70 | length 569.9
  Top Layer w7.87: J2.A7 310.04,867.13 284.67,867.13 277.76,874.04 277.76,895.64 284.67,902.56 J2.B7@310.04,902.56 ; J2.B7 J2.B7@310.04,902.56 ; U1.70 643.7,1071.89 615.35,1071.89 614.96,1071.5 390.99,1071.5 373.62,1054.13 373.62,940.78 339.34,906.5 337.43,906.5 333.49,902.56 J2.B7@310.04,902.56
USB_P: J2.A6 J2.B6 U1.71 | length 544.1
  Top Layer w7.87: J2.B6 313.98,847.44 339.34,847.44 346.26,854.36 346.26,875.96 339.34,882.87 ; J2.A6 313.98,882.87 339.34,882.87 ; U1.71 643.7,1055.35 615.35,1055.35 614.96,1055.75 397.51,1055.75 389.37,1047.61 389.37,934.25 345.86,890.75 343.95,890.75 339.34,886.14 339.34,882.87
VCAP1: C1.2 U1.48 | length 111.9
  Top Layer w7.87: U1.48 752.36,1515.2 752.36,1547.63 774.73,1570 781.46,1570 800.35,1588.9 C1.2 ; C1.2@815.35,1588.9 C1.2@815.35,1595
VCAP2: C3.2 U1.73 | length 85
  Top Layer w7.87: C3.2@564.65,995 C3.2@564.65,995.51 ; C3.2 574.06,1014.41 U1.73
WS: MK1.1 MK2.1 U1.28 | length 881.3
  Top Layer w7.87: U1.28 1144.49,1466.27 1156.5,1454.26 v1(1156.5,1450) ; v1(1243.59,845.58) cw(c1243.59,844.61) 1244.57,844.61 MK2.1 ; MK1.1 v1(1375,845)
  Bottom Layer w7.87: v1(1156.5,1450) 1243.59,1362.9 1243.59,1132.86 1250.12,1126.33 1250.12,1080.67 1243.59,1074.15 v1(1243.59,845.58) 1243.88,845.29 1374.71,845.29 v1(1375,845)
pads on no net: "SD Card1." J2. J2.A8 J2.B8 MK1. MK2. U1.1 U1.2 U1.3 U1.4 U1.5 U1.6 U1.7 U1.15 U1.16 U1.18 U1.22 U1.23 U1.24 U1.25 U1.31 U1.32 U1.33 U1.34 U1.35 U1.36 U1.37 U1.38 U1.39 U1.40 U1.41 U1.42 U1.43 U1.44 U1.45 U1.46 U1.47 U1.51 U1.52 U1.53 U1.54 U1.55 U1.56 U1.57 U1.58 U1.59 U1.60 U1.61 U1.62 U1.63 U1.64 U1.67 U1.68 U1.69 U1.72 U1.76 U1.77 U1.81 U1.82 U1.84 U1.85 U1.86 U1.87 U1.89 U1.90 U1.91 U1.92 U1.93 U1.95 U1.96 U1.97 U1.98

## Polygon pours and split planes (outlines as drawn)
GND on Top Layer "GND_L01_P001" (solid, remove dead copper, pour order 1): 0,1830 0,0 5,5 1905,5 1905,1785 1915,1795
GND on Bottom Layer "GND_L02_P002" (solid, remove dead copper, pour order 2): 0,1820 5,1815 5,0 1905,0 1915,10 1910,15 1910,1795

## Keep-outs
Keep-Out Layer:
  circle w10: c835,875 r787.4

## Other copper
Top Layer:
  region net +5V: 125,1125 cw(c130,1125) 130,1130 270,1130 ccw(c270,1135) 275,1135 275,1140 cw(c280,1140) 280,1145 325,1145 cw(c325,1140) 330,1140 330,1125 ccw(c335,1125) 335,1120 355,1120 cw(c355,1115) 360,1115 360,1100 cw(c350,1100) 350,1090 265,1090 ccw(c265,1085) 260,1085 cw(c255,1085) 255,1080 130,1080 cw(c130,1085) 125,1085
  region net +3.3V: 1450,925 cw(c1455,925) 1455,930 1495,930 cw(c1495,925) 1500,925 ccw(c1505,925) 1505,920 1580,920 cw(c1580,915) 1585,915 1585,870 cw(c1580,870) 1580,865 1565,865 ccw(c1565,860) 1560,860 1560,785 cw(c1555,785) 1555,780 1515,780 cw(c1515,785) 1510,785 1510,805 ccw(c1500,805) 1500,815 1440,815 cw(c1440,820) 1435,820 1435,840 cw(c1440,840) 1440,845 1445,845 ccw(c1445,850) 1450,850
  region net GND: 1385,655 cw(c1395,655) 1395,665 1435,665 cw(c1435,660) 1440,660 1440,645 ccw(c1445,645) 1445,640 1500,640 cw(c1500,635) 1505,635 1505,595 cw(c1500,595) 1500,590 1445,590 ccw(c1445,585) 1440,585 1440,530 cw(c1435,530) 1435,525 1430,525 ccw(c1430,520) 1425,520 1425,410 cw(c1415,410) 1415,400 1370,400 cw(c1370,415) 1355,415 1355,435 cw(c1385,435) 1385,465
  region net GND: 85,712.93 cw(c102.07,712.93) 90,725 320,725 cw(c320,712.93) 328.54,721.46 330,720 330,675 cw(c325,675) 325,670 300,670 ccw(c300,660) 290,660 290,610 cw(c285,610) 285,605 165,605 cw(c165,615) 155,615 155,665 ccw(c150,665) 150,670 90,670 cw(c90,675) 85,675
  region net +3.3V: 450,1480 cw(c470,1480) 470,1500 550,1500 ccw(c550,1505) 555,1505 555,1530 cw(c560,1530) 560,1535 630,1535 cw(c617.93,1522.93) 635,1522.93 635,1492.07 cw(c617.93,1492.07) 630,1480 cw(c617.93,1492.07) 617.93,1475 600,1475 ccw(c612.07,1462.93) 595,1462.93 595,1152.07 cw(c577.93,1152.07) 590,1140 545,1140 cw(c545,1152.07) 536.46,1143.54 530,1150 530,1180 ccw(c525,1180) 525,1185 290,1185 cw(c290,1200) 275,1200 275,1230 cw(c280,1230) 280,1235 445,1235 ccw(c445,1240) 450,1240
Bottom Layer:
  text "Ver 5 E3Research" at 955,366.57 h50

## Text inside footprints (layer, text, board x,y; h text height)
J2: Mechanical 13 "PCB EDGE" at 50.2,670.28 h24 r270